# Altium PCB JacdacPinHeaders 45.PcbDoc
Units mm, origin at the board's own origin, x right, y up, seen from the top; angles counter-clockwise.
Board outline 14 x 22.35 mm, 2 copper layers (Top Layer, Bottom Layer), stack 1.525 mm thick; 16 components, 7 nets, 43 pads, 4 vias.
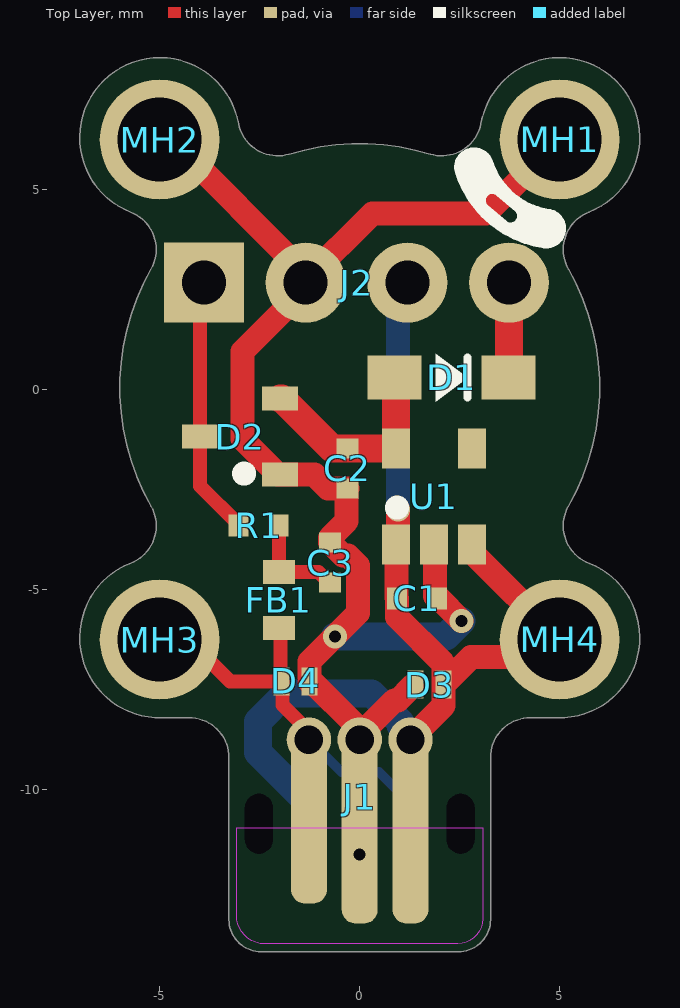
[diagram p0: Top Layer view]
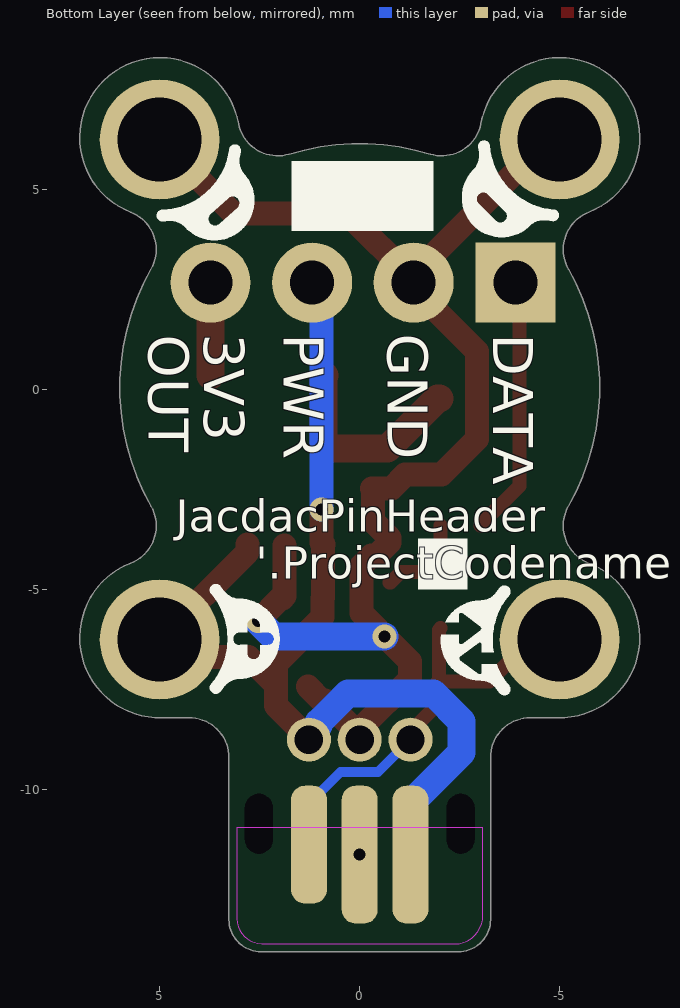
[diagram p1: Bottom Layer view, seen from below]

## Layer stack, top to bottom
Top Solder: solder mask 0.0102, Solder Resist, Dk 3.5
Top Layer: signal copper 0.0356
Dielectric 1: core 1.454, FR-4, Dk 4.2
Bottom Layer: signal copper 0.0356
Bottom Solder: solder mask 0.0102, Solder Resist, Dk 3.5

## Board outline
-3.27,-13.25 -3.27,-9.2 ccw(c-4.27,-9.2) -4.27,-8.2 -4.95,-8.2 cw(c-5,-6.2) -5.726,-4.336 ccw(c-6.089,-3.404) -5.219,-2.91 cw(c0,0.05) -5.219,3.01 ccw(c-6.089,3.504) -5.726,4.436 cw(c-5,6.3) -3.031,6.649 ccw(c-2.05,6.846) -1.766,5.887 -1.765,5.887 cw(c0,0.05) 1.765,5.887 1.766,5.887 ccw(c2.05,6.846) 3.031,6.649 cw(c5,6.3) 5.726,4.436 ccw(c6.089,3.504) 5.219,3.01 cw(c0,0.05) 5.219,-2.91 ccw(c6.089,-3.404) 5.726,-4.336 cw(c5,-6.2) 4.95,-8.2 4.27,-8.2 ccw(c4.27,-9.2) 3.27,-9.2 3.27,-13.25 cw(c2.471,-13.251) 2.47,-14.05 -2.47,-14.05 cw(c-2.471,-13.251)

## Design rules (kind name [scope] priority, off if disabled: settings)
AssemblyTestPointUsage [All] p1: valid=2
BoardOutlineClearance IGNORE_ALIGNMENT_HOLES [InComponent('J1')] p1: gap=0.075 ignorepadtopadclearanceinfootprint=FALSE except(0: THPad-OutlineEdge)
BoardOutlineClearance IGNORE_KEEPOUT [IsKeepOut] p2: gap=0 ignorepadtopadclearanceinfootprint=FALSE
BoardOutlineClearance POLY_COPPER_DISTANCE [IsPolygon] p3: gap=0.3 ignorepadtopadclearanceinfootprint=FALSE
BoardOutlineClearance [All] p4: gap=0.075 ignorepadtopadclearanceinfootprint=FALSE
Clearance [All] p1: gap=0.125 ignorepadtopadclearanceinfootprint=FALSE
Clearance Clearance_1 [OnLayer('Top Overlay') vs OnLayer('Top Overlay')] p2: gap=0 ignorepadtopadclearanceinfootprint=FALSE
DiffPairsRouting [All] p1: maxlimit=2 minlimit=0.15 mostfreqgap=0.15 toplayer_minwidth=0.15 toplayer_maxwidth=2 toplayer_prefwidth=0.15 bottomlayer_minwidth=0.15 bottomlayer_maxwidth=2 bottomlayer_prefwidth=0.15 maxuncoupledlength=25
FabricationTestPointUsage [All] p1: valid=2 allowmultiple=FALSE
HoleSize [All] p1: absolutevalues=TRUE maxlimit=5 minlimit=0.2 maxpercent=80.000 minpercent=20.000
MinimumSolderMaskSliver [All] p1: minsoldermaskwidth=0.005
PlaneClearance [All] p1: clearance=0.3
PlaneConnect [All] p1: planeconnectstyle=Relief reliefexpansion=0.5 reliefentries=4 reliefconductorwidth=0.2 reliefairgap=0.3
PolygonConnect CONNECT_POLY_DC_DC [IsNamedPolygon('DC_DC_GND') or IsNamedPolygon('DC_DC_VUBIT') or IsNamedPolygon('GND') or IsNamedPolygon('DC_DC_4V05')] p1: connectstyle=Relief reliefconductorwidth=0.254 reliefentries=4 polygonreliefangle="90 Angle" airgapwidth=0
PolygonConnect [All] p2: connectstyle=Relief reliefconductorwidth=0.2 reliefentries=4 polygonreliefangle="90 Angle" airgapwidth=0.2
RoutingVias [All] p1: holewidth=0.3 width=0.6 viastyle="Through Hole" minholewidth=0.3 minwidth=0.6 maxholewidth=0.3 maxwidth=0.8
SilkToSilkClearance [All] p1: silktosilkclearance=0.001
SilkToSolderMaskClearance [IsPad] p1: minsilkscreentomaskgap=0.05 clearancetoexposedcopper=TRUE
SolderMaskExpansion SolderMaskExpansion_1 [IsVia] p1: expansion=0.102 istentingtop=TRUE useseparateexpansions=TRUE expansionbottom=0.102 istentingbottom=TRUE
SolderMaskExpansion [All] p2: expansion=0.075 istentingtop=FALSE
Width [All] p1: maxlimit=2 minlimit=0.15 preferedwidth=0.15 minimp=50.000000 maximp=50.000000 favimp=50.000000
21 further rules are at their usual default settings.

## Components (designator, comment, footprint, x,y, rotation, side; value= is the part's Value field where it differs from the comment)
C1 "CL05A105KP5NNNC" "C0402_0.55MM - without outline" 1.431,-5.216 r180 top
C2 "CL05A105KP5NNNC" "C0402_0.55MM - without outline" -0.311,-1.971 r90 top
C3 "CL05C330JB51PNC" "C0402_0.55MM - without outline" -0.743,-4.326 r270 top
D1 "RB161MM-20TR" SOD-123F 2.3,0.3 r180 top
D2 "BAT54S" "NXP-BAT54S-TO-236AB - without outline" -2.991,-1.175 r180 top
D3 "RCLAMP0521P-N" "TVS 0402 - L" 1.749,-7.376 r180 top
D4 "RCLAMP0521P-N" "TVS 0402 - L" -1.602,-7.29 r0 top
FB1 "TDK MPZ1608S102ATA00" "TDK MPZ1608 0.8mm - without outline" -2.023,-5.264 r90 top
J1 "3 pin JACDAC edge connector" JACDAC_EDGE_CONNECTOR_NO_TRACES 0,-8.2 r180 top
J2 "HDR 4x1 0.1\"" "GENERIC 1X4 2.54MM HEADER" -1.35,2.675 r180 top
MH1 "MH_5.0MMK_3.0MMC_2.1MMD_PTH" MH_5.0MMK_3.0MMC_2.1MMD_PTH 5,6.25 r0 top
MH2 "MH_5.0MMK_3.0MMC_2.1MMD_PTH" MH_5.0MMK_3.0MMC_2.1MMD_PTH -5,6.25 r180 top
MH3 "MH_5.0MMK_3.0MMC_2.1MMD_PTH" MH_5.0MMK_3.0MMC_2.1MMD_PTH -5,-6.25 r270 top
MH4 "MH_5.0MMK_3.0MMC_2.1MMD_PTH" MH_5.0MMK_3.0MMC_2.1MMD_PTH 5,-6.25 r270 top
R1 "RC0402FR-07220RL" "R0402 - Without outline" -2.525,-3.4 r0 top
U1 "ME6211C33M5G-N" MICRONE-SOT23-5 1.855,-2.675 r90 top

## Footprints (in the part's own frame and the unit in brackets; to place one, negate y for a bottom-side part, rotate by r counter-clockwise, add the part's x,y. Pads: shape width x height; smd on the part's side, far side on the other; paste and mask are expansions set on the pad)
"C0402_0.55MM - without outline" [mm]
  rect 0.5x0.55 smd: 1(-0.5,0) 2(0.5,0)
  body extent -0.5,-0.25 0.5,0.25, height 0.55
"GENERIC 1X4 2.54MM HEADER" [mm] "1x4 2.54mm 0.1\" header vertical th"
  rect 2x2 hole 1.1: 1(2.54,0)
  round 2 hole 1.1: 2(0,0) 3(-2.54,0) 4(-5.08,0)
  body extent -6.35,-1.27 3.81,1.27, height 8.65
JACDAC_EDGE_CONNECTOR_NO_TRACES [mm] "JacDac 3 pin connector with no traces"
  rrect78% 0.9x2.95 smd far side paste-1 mask+0: 1(-1.27,3.175)
  rrect78% 0.9x4.3 smd paste-1 mask+0: 1(1.27,2.5)
  round 1.11 / inner round 0.71 / far side round 1.1 hole 0.71 paste-0.254 mask+0: 1(1.27,0.55) 2(0,0.55) 3(-1.27,0.55)
  rrect78% 0.9x3.45 smd far side paste-1 mask+0: 2(0,3.425) 3(1.27,3.425)
  rrect78% 0.9x4.8 smd paste-1 mask+0: 2(0,2.75) 3(-1.27,2.75)
  round 0 hole 0.7 slot 1.5 at 90 deg unplated: ""(-2.52,2.65) ""(2.52,2.65)
  Top Layer keep-out region: -3.075,2.75 -3.07,5.033 -2.987,5.341 -2.761,5.567 -2.453,5.65 -2.453,5.65 2.27,5.65 2.545,5.635 2.794,5.516 2.978,5.31 3.07,5.05 3.07,5.05 3.07,2.75
  Bottom Layer lines w0.2: -1.126,0.85 -1.27,0.85
  Bottom Layer keep-out region: -3.07,2.75 -3.07,5.033 -3.023,5.269 -2.889,5.469 -2.689,5.603 -2.453,5.65 -2.453,5.65 2.27,5.65 2.545,5.635 2.794,5.516 2.978,5.31 3.07,5.05 3.07,5.05 3.07,2.75
MH_5.0MMK_3.0MMC_2.1MMD_PTH [mm] "Mounting Hole 5.0mm clearance, 3.1 annualar ring and 2.1mm PTH"
  round 3 hole 2.1 mask+0.05: 1(0,0)
MICRONE-SOT23-5 [mm]
  rect 1x0.7 smd: 1(-1.2,0.95) 2(-1.2,0) 3(-1.2,-0.95) 4(1.2,-0.95) 5(1.2,0.95)
  silkscreen extent -0.32,0.87 -0.23,0.97, body extent -1.32,-1.5 1.32,1.5, height 1.11
"NXP-BAT54S-TO-236AB - without outline" [mm] "SOT23, 3-Leads, Body 2.90x2.30mm, Pitch 0.95mm, IPC Medium Density"
  rect 0.9x0.6 smd: 1(-1,0.95) 2(-1,-0.95) 3(1,0)
  silkscreen extent -0.15,0.88 -0.05,0.97, body extent -1.32,-1.5 1.32,1.5, height 1.12
"R0402 - Without outline" [mm]
  rect 0.5x0.55 smd: 1(-0.5,0) 2(0.5,0)
  body extent -0.5,-0.25 0.5,0.25, height 0.35
SOD-123F [mm] "SODFL, 2-Leads, Body 1.65x3.60mm, IPC Medium Density"
  rect 1.35x1.1 smd: 1(-1.425,0) 2(1.425,0)
  silkscreen extent -0.4,-0.6 0.4,0.6, body extent -1.73,-0.82 1.72,0.82, height 0.95
"TDK MPZ1608 0.8mm - without outline" [mm]
  rect 0.6x0.8 smd: 1(-0.7,0) 2(0.7,0)
  body extent -0.8,-0.4 0.8,0.4, height 0.8
"TVS 0402 - L" [mm] "TVS 0402 RoHS"
  rect 0.4x0.7 smd paste-0.038 mask+0.05: 1(-0.35,0) 2(0.35,0)
  body extent -0.5,-0.3 0.5,0.3, height 0.5

## Part data
C1 C2: "CAP CER 1UF 10V X5R 0402", Capacitance=1µF, Case Code (Imperial)=0402, Case Code (Metric)=1005, Dielectric=X5R, Manufacturer=Samsung, Max Operating Temperature=85°C, Min Operating Temperature=-55°C, Package Quantity=1, Supplier Part Number 1=1276-1076-1-ND, Tolerance=10%, Voltage Rating=10V, Case/Package=0402, Category=Capacitors, Checked=?, ComponentLink1Description="Online datasheet", ComponentLink1URL=https://datasheet.ciiva.com/15195/getdatasheetpartid-358390-15195630.pdf, Contact Plating=Tin, Created=DG, Depth=0.5mm, Height=0.5mm, Length=1mm, Manufacturer Part Number=CL05A105KP5NNNC, Material=Ceramic, Mount="Surface Mount", Packaging="Tape and Reel", Pricing 1="1=0.10000, 10=0.03900, 50=0.02100, 100=0.01720, 500=0.01228, 1000=0.00965, 2500=0.00877, 5000=0.00807 (USD)", Pricing 2="1=0.10000, 10=0.04200, 100=0.01800, 500=0.01300, 1000=0.01000, 2500=0.00900 (USD)", Pricing 3="10=0.02450, 100=0.02000, 500=0.01310, 2500=0.00920, 5000=0.00810, 10000=0.00640, 50000=0.00490 (GBP)", Radiation Hardening=No, RoHS=Yes, Stock 1=5705569, Stock 2=928941, Stock 3=53670, Supplier 1=Digi-Key, Supplier 2=Mouser, Supplier 3=Farnell, Supplier Part Number 2=187-CL05A105KP5NNNC, Supplier Part Number 3=3013329, Thickness=0.022inch, Width=0.02inch
C3: "CAP CER 33PF 50V NP0 0402", Capacitance=33pF, Case Code (Imperial)=0402, Case Code (Metric)=1005, Manufacturer=Samsung, Max Operating Temperature=125°C, Min Operating Temperature=-55°C, Ratings=AEC-Q200, Supplier Part Number 1=1276-6515-1-ND, Tolerance=5%, Voltage Rating=50V, Case/Package=0402, Category=Capacitors, Checked=?, ComponentLink1Description="Samsung datasheet online", ComponentLink1URL=http://www.samsungsem.com/kr/support/library/product-catalog/mlcc.jsp, Created=DG, Lead Free="Lead Free", Length=0.039inch, Manufacturer Part Number=CL05C330JB51PNC, Mount="Surface Mount", Packaging="Tape and Reel", Pricing 1="1=0.10000, 10=0.07500, 50=0.04060, 100=0.03320, 500=0.02374, 1000=0.01865, 2500=0.01696, 5000=0.01560 (USD)", Pricing 2="1=0.11000, 10=0.08200, 100=0.03600, 500=0.02600, 1000=0.02000, 2500=0.01800 (USD)", Pricing 3="10000=0.00780 (USD)", RoHS=Yes, Stock 1=250654, Stock 2=97900, Stock 3=100000, Supplier 1=Digi-Key, Supplier 2=Mouser, Supplier 3="Future Electronics", Supplier Part Number 2=187-CL05C330JB51PNC, Supplier Part Number 3=6022520, Thickness=0.022inch, Width=0.02inch
D1: "ROHM - RB161MM-20TR - Schottky-Gleichrichterdiode, 20 V, 1 A, Einfach, SOD-123FL, 2 Pin(s), 350 mV", Average Rectified Current=1A, Case/Package=SOD, Manufacturer=Rohm, Max Operating Temperature=125°C, Max Reverse Voltage (DC)=25V, Supplier Part Number 1=RB161MM-20TR-ND, Category="Rectifier Diodes", ComponentLink1Description="Online datasheet", ComponentLink1URL=http://www.mouser.com/ds/2/348/rb161mm-20tr-e-1138856.pdf, Manufacturer Part Number=RB161MM-20TR, Mount="Surface Mount", Number of Pins=2, Packaging="Tape and Reel", Pricing 1="3000=0.09900, 6000=0.09350, 15000=0.08525, 30000=0.07975, 75000=0.07500 (USD)", Pricing 2="30=0.29200, 150=0.15800, 300=0.15300, 750=0.14900, 1500=0.14500 (USD)", Pricing 3="1=0.33000, 10=0.25100, 50=0.25100, 100=0.12500, 1000=0.10000, 10000=0.07600 (USD)", RoHS=Yes, RoHS Compliant=Yes, Stock 2=1, Supplier 1=Digi-Key, Supplier 2=RSComponents, Supplier 3=Mouser, Supplier Part Number 2=1246775, Supplier Part Number 3=755-RB161MM-20TR
D2: "DIODE ARRAY SCHOTTKY 30V SOT23", Manufacturer=Nexperia, Manufacturer Part Number=BAT54S,235, Supplier Part Number 1=1727-1868-1-ND, Category="Rectifier Diodes", ComponentLink1Description="NXP datasheet online", ComponentLink1URL=https://assets.nexperia.com/documents/data-sheet/BAT54_SER.pdf, Pricing 1="1=0.13000, 10=0.11900, 100=0.05610, 500=0.03326, 1000=0.02185, 5000=0.02138 (USD)", RoHS=No, Stock 1=14011, Supplier 1=Digi-Key, Supplier 2=Mouser, Supplier 3=RSComponents, Supplier Part Number 2=771-BAT54S235, Supplier Part Number 3=1707990
D3 D4: "Bidirectional 5V (Max) 6V 16V 3.5A (8/20us) 0402 TVS RoHS", Manufacturer="Born Semiconductor", Package=0402, Supplier1 Part Number=C316043, Checked By=?, ComponentLink1Description="Online datasheet", ComponentLink1URL=https://datasheet.lcsc.com/szlcsc/Bourne-Semicon-Shenzhen-RCLAMP0521P-N_C316043.pdf, Created By="D Gakure", Manufacturer Part Number=RCLAMP0521P-N, Supplier1=LCSC
FB1: "0603 1k@100MHz 0.8A chip", Case Code (Imperial)=0603, Case Code (Metric)=1608, Current Rating=800mA, DC Resistance (DCR)=300mR, Manufacturer=TDK, Manufacturer Part Number=MPZ1608S102ATA00, Package Quantity=4000, Supplier Part Number 1=445-8694-1-ND, Tolerance=25%, Case/Package=0603, ComponentLink2Description="datasheet online", ComponentLink2URL=https://www.mouser.co.uk/datasheet/2/400/eads_commercial_power_mpz1608_en-923650.pdf, ComponentLink3Description=datasheet, ComponentLink3URL="Y:\System\Altium\Libraries 2014\TDK\Datasheets\eads_commercial_power_mpz1608_en-923650.pdf", Core Material=Ferrite, Height=0.037inch, Impedance="1kR @ 100MHz", Length=0.063inch, Max DC Current=800mA, Mount="Surface Mount", Packaging="Tape and Reel", Pricing 1="1=0.1, 10=0.079, 25=0.0716, 50=0.0644, 100=0.0472, 250=0.03432, 500=0.03146, 1000=0.02717 (USD)", Stock 1=113542, Supplier 1=Digi-Key, Supplier 2=Mouser, Supplier Part Number 2=810-MPZ1608S102ATA00, Width=0.031inch
J1: library part "Jacdac edge connector", "3 pin Jacdac edge connector 1.27mm pitch", Manufacturer Part Number=JACDAC_EDGE_CONNECTOR, Checked By=?, ComponentLink1Description="Yuliang JACDAC cable connector drawing online", ComponentLink1URL=https://github.com/microsoft/jacdac-mdk/blob/main/connector/JACDAC-Connector-by-Yuliang-2020-11-28.pdf, ComponentLink2Description="JACDAC PCB edge connector spec onlin", ComponentLink2URL=https://github.com/microsoft/jacdac-mdk/blob/main/connector/JACDAC_PCB_Edge_Connector_Drawing_JD-PEC-01_rev_01.pdf, Created By="D. Gakure", PCB Type="1.6mm FR4"
J2: library part "Header Multicomp 2211S-04G-whitesch", "2.54mm, 4x1 way, vertical, square pin, gold plate", Contact Resistance=20, Current Rating=3, Flammability Rating=UL94V-0, Insulation Resistance=1000, Manufacturer=Multicomp, Manufacturer Part Number=2211S-04G, Operating Temperature Max=105, Operating Temperature Min=-40, Supplier Part Number 1=1593413, Voltage Rating V AC=250, Withstand Voltage="600V<!--FANDB--><div class=\"features-and-benefits-container\"><div class=\"features-and-benefits-description\"><span class=\"features-benefits-value\">The 2211S-04G is a 4-pin 1-row PCB Header with gold plated copper alloy contacts and a black high temperature plastic (PBT) insulator. This board-to-board holder is ideal for through hole vertical mounting.</span></div><div class=\"features-and-benefits-list\"><ul class=\"features-and-benefits-list-list\"><li class=\"features-and-benefits-list-item\">3A AC/DC Rated current</li><li class=\"features-and-benefits-list-item\">250VAC/DC Rated voltage</li><li class=\"features-and-benefits-list-item\">20", ComponentLink1Description="header strip datasheet", ComponentLink1URL=http://www.farnell.com/datasheets/1518407.pdf, Contact Material="Copper Alloy", Contact Plating="Gold Plated Contacts", Contact Termination=Solder, Contact Termination Type="Through Hole", Created By=HUGHWI, Gender=Header, Lead Spacing=2.54, No. of Contacts=4, No. of Rows=1, Pitch Spacing=2.54, Pricing 1="1=0.0973, 5=0.0918, 25=0.0864, 50=0.0808, 100=0.0753, 250=0.032 (GBP)", Product Range=2211, RoHS=YES, Stock 1=2760, Supplier 1=Farnell, SVHC="No SVHC (17-Dec-2015)", Termination Method=Solder
MH1 MH2 MH3 MH4: "Mounting Hole 5.0mm keepout, 3.0mm annualar ring and 2.1mm Drill PTH"
R1: "RES SMD 220 OHM 1% 1/16W 0402", Case Code (Imperial)=0402, Case Code (Metric)=1005, Manufacturer=Yageo, Max Operating Temperature=155°C, Max Power Dissipation=63mW, Min Operating Temperature=-55°C, Package Quantity=1, Power Rating=62.5mW, Resistance=220R, Resistor Type="Thick Film", Supplier Part Number 1=311-220LRCT-ND, Temperature Coefficient=100ppm/°C, Tolerance=1%, Voltage Rating=50V, Case/Package=0402, Category=Resistors, Checked=?, ComponentLink1Description=https://datasheet.ciiva.com/11819/0900766b80c66297-11819466.pdf?src-supplier=RSComponents, ComponentLink1URL=https://datasheet.ciiva.com/11819/0900766b80c66297-11819466.pdf?src-supplier=RSComponents, ComponentLink2Description=https://datasheet.ciiva.com/2453/pyu-r-int-thick-7-2453460.pdf?src-supplier=Digi-Key, ComponentLink2URL=https://datasheet.ciiva.com/2453/pyu-r-int-thick-7-2453460.pdf?src-supplier=Digi-Key, ComponentLink3Description=https://datasheet.ciiva.com/2453/pyu-r-int-thick-7-2453461.pdf?src-supplier=Digi-Key, ComponentLink3URL=https://datasheet.ciiva.com/2453/pyu-r-int-thick-7-2453461.pdf?src-supplier=Digi-Key, ComponentLink4Description=https://datasheet.ciiva.com/2453/pyu-r-int-thick-7-2453462.pdf?src-supplier=Digi-Key, ComponentLink4URL=https://datasheet.ciiva.com/2453/pyu-r-int-thick-7-2453462.pdf?src-supplier=Digi-Key, ComponentLink5Description=https://datasheet.ciiva.com/16746/pyu-rc0402-51-rohs-l-6-r-16746831.pdf?src-supplier=Future+Electronics, ComponentLink5URL=https://datasheet.ciiva.com/16746/pyu-rc0402-51-rohs-l-6-r-16746831.pdf?src-supplier=Future+Electronics, Created=D.G, Depth=0.5mm, Features="Moisture Resistant", Height=0.016inch, Lead Free="Lead Free", Length=1mm, Manufacturer Part Number=RC0402FR-07220RL, Military Standard=Not, Number of Pins=2, Number of Terminations=2, Packaging="Tape and Reel", Pricing 1="1=0.10000, 10=0.01400, 100=0.00580, 1000=0.00262, 2500=0.00228, 5000=0.00188 (USD)", Pricing 2="1=0.10000, 10=0.01200, 100=0.00400, 1000=0.00400, 2500=0.00400, 10000=0.00300 (USD)", Pricing 3="1=0.08130, 25=0.01210, 100=0.01120, 250=0.01030, 500=0.00900 (GBP)", REACH SVHC="No SVHC", RoHS=Yes, Stock 1=1286042, Stock 2=324625, Stock 3=18234, Supplier 1=Digi-Key, Supplier 2=Mouser, Supplier 3=Farnell, Supplier Part Number 2=603-RC0402FR-07220RL, Supplier Part Number 3=2147864, Termination=SMD/SMT, Voltage Rating (DC)=50V, Width=0.02inch
U1: "6V 260mV @ 200mA(typ) - - Fixed 3.3V SOT-23-5 Linear Voltage Regulators (LDO) ROHS", Case/Package=SOT-23-5, Dropout Voltage=200mV, Manufacturer="MICRONE(Nanjing Micro One Elec)", Max Input Voltage=6, Min Output Voltage=3.3V, Output Current=500mA, Supplier Part Number=C82942, Category="Voltage Regulators - Linear", Checked=?, ComponentLink3Description="On Semi datasheet online", ComponentLink3URL=https://datasheet.lcsc.com/lcsc/1811131510_MICRONE-Nanjing-Micro-One-Elec-ME6211C33M5G-N_C82942.pdf, Created=DG, Manufacturer Part Number=ME6211C33M5G-N, Mount="Surface Mount", Number of Regulators=1, Output Configuration=Positive, Output Type=Fixed, Pricing 1="1=0.33000, 10=0.24900, 25=0.21760, 100=0.12440, 250=0.11664, 500=0.09330, 1000=0.07153 (USD)", Stock 1=32529, Supplier 1=LCSC

## Via types
v1: diameter 0.6, hole 0.3, Top Layer to Bottom Layer, tented both sides, 4 vias

## Nets (pads, with @x,y where several pads share a name; then routed paths per layer and width w, separated by ;. In a path a pad name is that pad's centre, name@x,y a point inside that pad or via, vN(x,y) a via of type N, cw(c..) or ccw(c..) an arc to the next point about the centre after c; other vN are vias at no path point)
3V3: C2.2 D1.2 D2.2 U1.5 | length 5.3
  Top Layer w0.7: D2.2 -1.941,-0.225 -0.694,-1.471 C2.2 -0.309,-1.473 0.903,-1.473 U1.5 0.905,0.32 D1.2@0.875,0.35
GND: C1.1 C2.1 C3.1 D2.1 D3.2 D4.2 J1.2 J2.2 MH1.1 MH2.1 U1.2 | length 36.1
  Top Layer w0.6: MH2.1 -4.708,6.25 -1.34,2.882 J2.2@-1.34,2.75 ; C2.1@-0.325,-2.486 -0.325,-3.285 -0.743,-3.703 C3.1 -0.418,-4.151 -0.292,-4.151 -0.043,-4.4 -0.043,-5.587 -1.252,-6.796 D4.2 -1.202,-7.29 -0.098,-8.395 -0.098,-8.652 0,-8.75 J1.2@0,-8.634 ; C2.1 -0.79,-2.471 -1.137,-2.125 D2.1 -2.041,-2.125 -2.929,-1.236 -2.929,0.95 -1.34,2.539 J2.2@-1.34,2.75 ; J1.2@0,-8.725 J1.2@0,-8.634 ; D3.2@1.299,-7.426 0.955,-7.77 0.864,-7.77 J1.2@0,-8.634 ; U1.2@1.876,-3.896 1.876,-5.161 C1.1 1.978,-5.216 v1(2.542,-5.78) ; MH1.1 3.154,4.404 0.314,4.404 J2.2@-1.34,2.75
  Bottom Layer w0.7: v1(-0.623,-6.167) 2.155,-6.167 v1(2.542,-5.78)
  other v1: 0,-11.625
JD_DATA: D4.1 FB1.1 J1.1 MH3.1 | length 10.8
  Top Layer w0.35: MH3.1 -4.283,-6.25 -3.243,-7.29 D4.1 ; FB1.1 -1.977,-6.01 -1.977,-7.265 D4.1 ; J1.1@-1.27,-8.75 -1.27,-8.544 -1.927,-7.887 -1.927,-7.315 D4.1
  Bottom Layer w0.25: J1.1@-1.27,-8.75 -0.459,-9.561 0.481,-9.561 1.27,-10.35 J1.1@1.27,-11.375
JD_DATA_HDR: D2.3 J2.1 R1.1 | length 6.6
  Top Layer w0.35: J2.1@-3.88,2.75 -3.991,2.639 D2.3 -3.991,-2.409 -3.025,-3.375 R1.1
JD_PWR: C1.2 D3.1 J1.3 J2.3 MH4.1 U1.1 U1.3 | length 27.6
  Top Layer w0.6: U1.1 0.955,-3.825 v1(0.955,-2.993) ; C1.2@0.917,-5.201 U1.1@0.917,-3.887 ; C1.2 0.931,-5.686 2.099,-6.854 D3.1 ; J1.3@1.27,-8.75 1.27,-8.727 2.099,-7.898 D3.1 ; U1.3 2.805,-4.064 MH4.1@4.991,-6.25 ; MH4.1 4.56,-6.69 2.785,-6.69 D3.1
  Bottom Layer w0.6: v1(0.955,-2.993) 0.955,2.505 J2.3@1.2,2.75
  Bottom Layer w0.7: J1.3@-1.27,-11.625 -1.27,-10.35 -2.545,-9.075 -2.545,-8.296 -1.85,-7.6 0.3,-7.6 1.025,-8.325 1.025,-8.397 1.27,-8.642 J1.3@1.27,-8.75
NetC3_2: C3.2 FB1.2 R1.2 | length 2.6
  Top Layer w0.35: FB1.2@-2.024,-4.563 R1.2@-2.024,-3.401 ; FB1.2 -1.03,-4.564 -0.768,-4.826 C3.2
NetD1_1: D1.1 J2.4 | length 2.4
  Top Layer w0.7: D1.1@3.725,0.35 3.732,0.357 3.732,2.742 J2.4@3.74,2.75
pads on no net: J1. U1.4

## Silkscreen, mask and mechanical layers (free items; w line width, h text height)
Top Overlay:
  region: 187 vertices and 1 holes, not listed, extent 2.365,3.532 5.156,6.053
Bottom Overlay:
  drawing of 6 lines, arcs and shapes, not listed
  text "DATA" at -3.333,1.4 h1 r90
  text "GND" at -0.7,1.4 h1 r90
  text "PWR" at 1.9,1.4 h1 r90
  text "3V3" at 3.89,1.4 h1 r90
  text "OUT" at 5.275,1.375 h1 r90
  text "JacdacPinHeader" at 4.6,-3.55 h0.8
  text "'.ProjectCodenameID'-'.ProjectRevision'" at 2.6,-4.724 h0.8
Dimension:
  lines w0.05: -1.766,5.887 cw(c-2.05,6.846) -3.031,6.649 ccw(c-5,6.3) -5.726,4.436 cw(c-6.089,3.504) -5.219,3.01 ccw(c0,0.05) -5.219,-2.91 cw(c-6.089,-3.404) -5.726,-4.336 ccw(c-5,-6.2) -4.95,-8.2 -4.27,-8.2 cw(c-4.27,-9.2) -3.27,-9.2 -3.27,-13.25 ccw(c-2.471,-13.251) -2.47,-14.05 2.47,-14.05 ccw(c2.471,-13.251) 3.27,-13.25 3.27,-9.2 cw(c4.27,-9.2) 4.27,-8.2 4.95,-8.2 ccw(c5,-6.2) 5.726,-4.336 cw(c6.089,-3.404) 5.219,-2.91 ccw(c0,0.05) 5.219,3.01 cw(c6.089,3.504) 5.726,4.436 ccw(c5,6.3) 3.031,6.649 cw(c2.05,6.846) 1.766,5.887 ; -1.765,5.887 cw(c0,0.05) 1.765,5.887
Board Outline:
  lines w0.05: -1.766,5.887 cw(c-2.05,6.846) -3.031,6.649 ccw(c-5,6.3) -5.726,4.436 cw(c-6.089,3.504) -5.219,3.01 ccw(c0,0.05) -5.219,-2.91 cw(c-6.089,-3.404) -5.726,-4.336 ccw(c-5,-6.2) -4.95,-8.2 -4.27,-8.2 cw(c-4.27,-9.2) -3.27,-9.2 -3.27,-13.25 ccw(c-2.471,-13.251) -2.47,-14.05 2.47,-14.05 ccw(c2.471,-13.251) 3.27,-13.25 3.27,-9.2 cw(c4.27,-9.2) 4.27,-8.2 4.95,-8.2 ccw(c5,-6.2) 5.726,-4.336 cw(c6.089,-3.404) 5.219,-2.91 ccw(c0,0.05) 5.219,3.01 cw(c6.089,3.504) 5.726,4.436 ccw(c5,6.3) 3.031,6.649 cw(c2.05,6.846) 1.766,5.887 ; -1.765,5.887 cw(c0,0.05) 1.765,5.887
Top Assy:
  lines w0.05: -1.766,5.887 cw(c-2.05,6.846) -3.031,6.649 ccw(c-5,6.3) -5.726,4.436 cw(c-6.089,3.504) -5.219,3.01 ccw(c0,0.05) -5.219,-2.91 cw(c-6.089,-3.404) -5.726,-4.336 ccw(c-5,-6.2) -4.95,-8.2 -4.27,-8.2 cw(c-4.27,-9.2) -3.27,-9.2 -3.27,-13.25 ccw(c-2.471,-13.251) -2.47,-14.05 2.47,-14.05 ccw(c2.471,-13.251) 3.27,-13.25 3.27,-9.2 cw(c4.27,-9.2) 4.27,-8.2 4.95,-8.2 ccw(c5,-6.2) 5.726,-4.336 cw(c6.089,-3.404) 5.219,-2.91 ccw(c0,0.05) 5.219,3.01 cw(c6.089,3.504) 5.726,4.436 ccw(c5,6.3) 3.031,6.649 cw(c2.05,6.846) 1.766,5.887 ; -1.765,5.887 cw(c0,0.05) 1.765,5.887
Bottom Assy:
  lines w0.05: -1.766,5.887 cw(c-2.05,6.846) -3.031,6.649 ccw(c-5,6.3) -5.726,4.436 cw(c-6.089,3.504) -5.219,3.01 ccw(c0,0.05) -5.219,-2.91 cw(c-6.089,-3.404) -5.726,-4.336 ccw(c-5,-6.2) -4.95,-8.2 -4.27,-8.2 cw(c-4.27,-9.2) -3.27,-9.2 -3.27,-13.25 ccw(c-2.471,-13.251) -2.47,-14.05 2.47,-14.05 ccw(c2.471,-13.251) 3.27,-13.25 3.27,-9.2 cw(c4.27,-9.2) 4.27,-8.2 4.95,-8.2 ccw(c5,-6.2) 5.726,-4.336 cw(c6.089,-3.404) 5.219,-2.91 ccw(c0,0.05) 5.219,3.01 cw(c6.089,3.504) 5.726,4.436 ccw(c5,6.3) 3.031,6.649 cw(c2.05,6.846) 1.766,5.887 ; -1.765,5.887 cw(c0,0.05) 1.765,5.887

## Dimensions
-2.47,-14.05 to 0,6.148 on Dimension
-5,-6.25 to -5,6.25 on Dimension
-6,0.05 to 6,0.05 on Dimension
-5,-6.25 to 5,-6.25 on Dimension
-3.27,-9.2 to 3.27,-9.2 on Dimension

## Text inside footprints (layer, text, board x,y; h text height)
J1: Mechanical 9 "Jacdac / cable connector  / body" at 4.821,-18.208 h1.7 r180; Alignment "board outline  / for 'outie'" at -5.14,-9.064 h1.2 r180; Alignment "board outline  / for 'innie'" at -4.53,-6.219 h1.2 r180